# Altium PCB old_Sampler_DIOT.PCBDOC (part 4 of 8)
Units mm, origin at the board's own origin, x right, y up, seen from the top; angles counter-clockwise.
Board outline 221.17 x 100 mm, 4 copper layers (Top, GP1(GND), L3, Bot), stack 1.648 mm thick; 664 components, 413 nets, 2128 pads, 926 vias.
Unrouted connection lines stored in the file: 1.
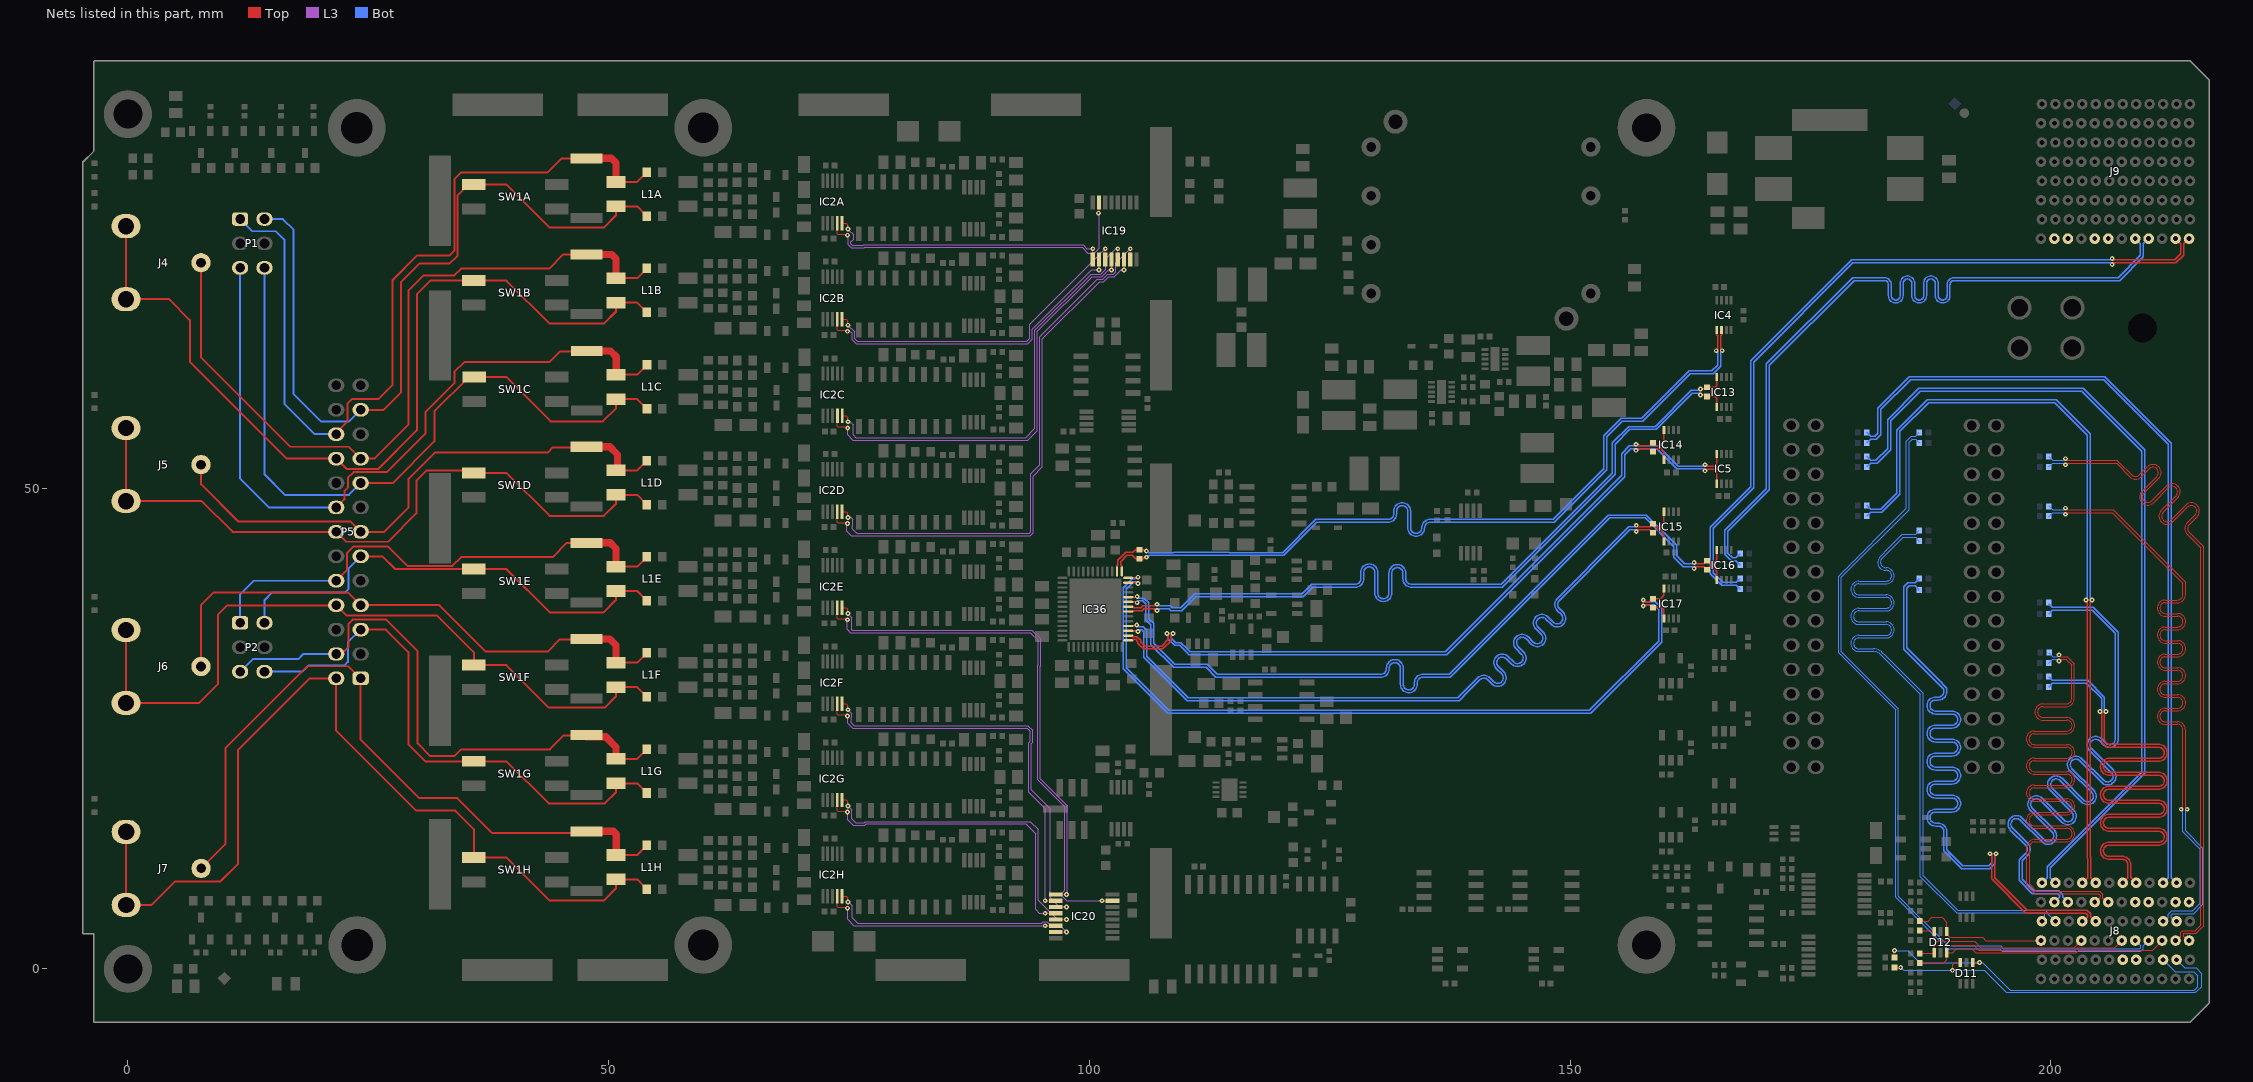
[diagram p5: the nets of this part, all layers, seen from the top]

## Via types
v1: diameter 0.5, hole 0.2, Top to Bot, tented both sides, 694 vias
v2: diameter 0.5, hole 0.2, Top to Bot, 186 vias
v3: diameter 0.6, hole 0.3, Top to Bot, tented both sides, 24 vias
v4: diameter 1, hole 0.6, Top to Bot, tented both sides, 12 vias
v5: diameter 0.6, hole 0.3, Top to Bot, 6 vias
v6: diameter 0.406, hole 0.203, Top to Bot, 2 vias
v7: diameter 1.27, hole 0.711, Top to Bot, 2 vias

## Nets (pads, with @x,y where several pads share a name; then routed paths per layer and width w, separated by ;. In a path a pad name is that pad's centre, name@x,y a point inside that pad or via, vN(x,y) a via of type N, cw(c..) or ccw(c..) an arc to the next point about the centre after c; other vN are vias at no path point)
ADC_CLKOUT_N: IC13.8 IC36.34 R20.2 | length 82.6
  Top w0.152: IC36.34@104.039,37.665 104.465,37.665 104.563,37.568 105.366,37.568 105.546,37.748 106.756,37.748 106.93,37.921 v1(107.019,37.921) ; v1(163.569,60.318) 164.054,60.318 R20.2@164.21,60.474 165.069,60.474 165.229,60.634 IC13.8@165.229,61.529
  Bot w0.152: v1(107.019,37.921) 107.108,37.921 107.282,37.748 108.413,37.748 108.593,37.568 109.484,37.568 110.938,39.023 122.123,39.023 123.105,40.005 127.429,40.005 127.658,40.005 ccw(c127.658,40.581) 128.234,40.581 128.234,41.232 cw(c129.115,41.232) 129.115,42.113 cw(c129.115,41.232) 129.996,41.232 129.996,39.082 ccw(c130.572,39.082) 130.572,38.506 ccw(c130.572,39.082) 131.148,39.082 131.148,41.174 cw(c132.029,41.174) 132.029,42.055 cw(c132.029,41.174) 132.91,41.174 132.91,40.581 ccw(c133.486,40.581) 133.486,40.005 140.2,40.005 142.83,40.005 154.375,51.55 154.375,54.703 156.077,56.405 158.83,56.405 162.582,60.157 163.408,60.157 v1(163.569,60.318)
ADC_CLKOUT_P: IC13.1 IC36.33 R20.1 | length 82.7
  Top w0.152: IC36.33@104.039,37.165 104.465,37.165 104.563,37.263 105.492,37.263 105.672,37.443 106.756,37.443 106.93,37.269 v1(107.019,37.269) ; v1(163.569,59.691) 164.054,59.691 R20.1@164.21,59.534 165.054,59.534 165.25,59.338 IC13.1@165.25,58.45
  Bot w0.152: v1(107.019,37.269) 107.108,37.269 107.282,37.443 108.287,37.443 108.466,37.263 109.61,37.263 111.065,38.718 122.249,38.718 123.231,39.7 127.429,39.7 127.658,39.7 ccw(c127.658,40.581) 128.539,40.581 128.539,41.232 cw(c129.115,41.232) 129.115,41.809 cw(c129.115,41.232) 129.691,41.232 129.691,39.082 ccw(c130.572,39.082) 130.572,38.201 ccw(c130.572,39.082) 131.453,39.082 131.453,41.174 cw(c132.029,41.174) 132.029,41.751 cw(c132.029,41.174) 132.605,41.174 132.605,40.581 ccw(c133.486,40.581) 133.486,39.7 140.2,39.7 142.956,39.7 154.68,51.424 154.68,54.577 156.203,56.1 158.956,56.1 162.708,59.852 163.408,59.852 v1(163.569,59.691)
ADC_IN_N0: L1A.2 P1.2 P5.23 R8A.1 SW1A.1 | length 82.8
  Top w0.203: P5.23@24.2,58.15 26.6,58.15 28.419,59.969 28.419,71.463 30.316,73.36 33.44,73.36 34.276,74.196 34.276,80.453 35.413,81.59 39.366,81.59 43.826,77.13 49.517,77.13 50.76,78.373 L1A.2@50.76,79.304 52.948,79.304 R8A.1@53.964,78.288
  Bot w0.203: P1.2@14.2,77.99 16.102,77.99 17.225,76.867 17.225,59.775 20.05,56.95 23,56.95 P5.23@24.2,58.15
ADC_IN_N1: J4.2 L1B.2 P5.20 R8B.1 SW1B.1 | length 91.8
  Top w0.203: J4.2@-0.2,77.25 J4.2@-0.2,69.65 4.274,69.65 6.45,67.474 6.45,63.125 16.505,53.07 P5.20@21.66,53.07 22.739,51.991 24.647,51.991 26.016,51.991 30.044,56.019 30.044,70.18 31.444,71.58 35.403,71.58 35.413,71.59 39.366,71.59 43.851,67.105 49.492,67.105 50.76,68.373 L1B.2@50.76,69.304 52.948,69.304 R8B.1@53.964,68.288
ADC_IN_N2: L1C.2 P1.6 P5.17 R8C.1 SW1C.1 | length 72.9
  Top w0.203: P5.17@24.2,50.53 27.545,50.53 31.869,54.854 31.869,57.989 35.426,61.546 39.379,61.546 43.97,56.955 49.398,56.955 50.773,58.329 L1C.2@50.773,59.26 52.961,59.26 R8C.1@53.977,58.244
  Bot w0.203: P1.6@14.2,72.91 14.2,51.425 16.325,49.3 22.97,49.3 P5.17@24.2,50.53
ADC_IN_N3: J5.2 L1D.2 P5.14 R8D.1 SW1D.1 | length 72.4
  Top w0.203: J5.2@-0.2,56.25 J5.2@-0.2,48.65 7.675,48.65 10.875,45.45 P5.14@21.66,45.45 22.685,44.425 27.05,44.425 30,47.375 30,50.784 31.046,51.83 35.173,51.83 35.413,51.59 39.366,51.59 43.851,47.105 49.492,47.105 50.76,48.373 L1D.2@50.76,49.304 52.948,49.304 R8D.1@53.964,48.288
ADC_IN_N4: L1E.2 P2.2 P5.11 R8E.1 SW1E.1 | length 49.6
  Top w0.203: P5.11@24.2,42.91 26.465,42.91 27.785,41.59 SW1E.1@35.986,41.59 39.366,41.59 43.876,37.08 49.467,37.08 50.76,38.373 L1E.2@50.76,39.304 52.948,39.304 R8E.1@53.964,38.288
  Bot w0.203: P2.2@14.2,35.99 14.2,38.35 14.975,39.125 22.55,39.125 22.925,39.5 22.925,41.635 P5.11@24.2,42.91
ADC_IN_N5: J6.2 L1F.2 P5.8 R8F.1 SW1F.1 | length 77.2
  Top w0.203: J6.2@-0.2,35.25 J6.2@-0.2,27.65 7.375,27.65 9.35,29.625 9.35,36.845 10.305,37.8 21.63,37.8 P5.8@21.66,37.83 22.714,36.776 32.123,36.776 35.986,32.913 SW1F.1@35.986,31.59 39.366,31.59 43.776,27.18 49.567,27.18 50.76,28.373 L1F.2@50.76,29.304 52.948,29.304 R8F.1@53.964,28.288
ADC_IN_N6: L1G.2 P2.6 P5.5 R8G.1 SW1G.1 | length 58.2
  Top w0.203: P5.5@23.7,35.29 25.63,35.29 26.835,35.29 29.17,32.955 29.17,23.355 30.935,21.59 SW1G.1@35.986,21.59 39.366,21.59 43.751,17.205 49.592,17.205 50.76,18.373 L1G.2@50.76,19.304 52.948,19.304 R8G.1@53.964,18.288
  Bot w0.203: P2.6@14.2,30.91 18.135,30.91 18.775,31.55 22.5,31.55 22.875,31.925 22.875,33.965 P5.5@24.2,35.29
ADC_IN_N7: J7.2 L1H.2 P5.2 R8H.1 SW1H.1 | length 94.8
  Top w0.203: J7.2@-0.195,14.25 J7.2@-0.195,6.65 2.45,6.65 4.9,9.1 9.625,9.1 11.425,10.9 11.425,22.725 18.91,30.21 P5.2@21.66,30.21 21.66,24.79 30,16.45 34.05,16.45 35.986,14.514 SW1H.1@35.986,11.59 39.366,11.59 43.826,7.13 49.517,7.13 50.76,8.373 L1H.2@50.76,9.304 52.948,9.304 R8H.1@53.964,8.288
ADC_IN_P0: L1A.1 P1.1 P5.22 R1A.1 R5A.2 | length 88
  Top w0.203: P5.22@21.66,55.61 21.66,55.76 22.825,56.925 22.825,58.771 23.349,59.295 26.07,59.295 27.53,60.755 27.53,71.65 30.06,74.18 33.414,74.18 33.946,74.712 33.946,82.133 34.649,82.836 43.65,82.836 45.077,84.263 47.652,84.263 R5A.2@47.694,84.305 ; L1A.1@50.76,81.844 52.961,81.844 53.847,82.73 53.847,82.743 R1A.1@53.964,82.86
  Top w0.762: R5A.2@47.694,84.305 50.294,84.305 50.76,83.839 L1A.1@50.76,81.844
  Bot w0.203: P1.1@11.66,77.99 12.93,76.72 15.394,76.72 16.275,75.839 16.275,58.775 19.44,55.61 P5.22@21.66,55.61
ADC_IN_P1: J4.1 L1B.1 P5.19 R1B.1 R5B.2 | length 80.2
  Top w0.203: J4.1@7.6,73.45 7.6,63.581 16.876,54.305 22.965,54.305 P5.19@24.2,53.07 25.63,53.07 29.2,56.64 29.2,70.575 30.758,72.133 33.946,72.133 34.649,72.836 43.825,72.836 45.294,74.305 47.544,74.305 47.619,74.23 R5B.2@47.694,74.305 ; L1B.1@50.76,71.844 52.961,71.844 53.847,72.73 53.847,72.743 R1B.1@53.964,72.86
  Top w0.762: R5B.2@47.694,74.305 50.319,74.305 50.76,73.864 L1B.1@50.76,71.844
ADC_IN_P2: L1C.1 P1.5 P5.16 R1C.1 R5C.2 | length 77.8
  Top w0.203: P5.16@21.66,47.99 22.505,48.835 22.505,49.683 22.863,50.041 22.863,51.063 23.461,51.661 26.894,51.661 30.95,55.717 30.95,57.922 33.958,60.93 33.958,62.089 34.974,63.105 43.819,63.105 44.944,64.23 47.654,64.23 47.665,64.219 R5C.2@47.707,64.261 ; L1C.1@50.773,61.8 52.973,61.8 53.86,62.686 53.86,62.699 R1C.1@53.977,62.816
  Top w0.762: R5C.2@47.707,64.261 50.188,64.261 50.769,63.68 50.769,61.804 L1C.1@50.773,61.8
  Bot w0.203: P1.5@11.66,72.91 11.66,50.99 14.66,47.99 P5.16@21.66,47.99
ADC_IN_P3: J5.1 L1D.1 P5.13 R1D.1 R5D.2 | length 58.5
  Top w0.203: J5.1@7.6,52.45 7.6,50.395 11.445,46.55 23.1,46.55 P5.13@24.2,45.45 26.653,45.45 29.2,47.997 29.2,50.986 31.944,53.73 43.694,53.73 44.194,54.23 47.619,54.23 R5D.2@47.694,54.305 ; L1D.1@50.76,51.844 52.961,51.844 53.847,52.73 53.847,52.743 R1D.1@53.964,52.86
  Top w0.762: R5D.2@47.694,54.305 50.119,54.305 50.919,53.505 50.919,52.003 L1D.1@50.76,51.844
ADC_IN_P4: L1E.1 P2.1 P5.10 R1E.1 R5E.2 | length 52.8
  Top w0.203: P5.10@21.66,40.37 22.775,41.485 22.775,43.236 23.489,43.95 27.025,43.95 29.055,41.92 33.733,41.92 34.649,42.836 44.175,42.836 45.644,44.305 47.61,44.305 47.652,44.263 R5E.2@47.694,44.305 ; L1E.1@50.76,41.844 52.961,41.844 53.847,42.73 53.847,42.743 R1E.1@53.964,42.86
  Top w0.762: R5E.2@47.694,44.305 50.169,44.305 50.76,43.714 L1E.1@50.76,41.844
  Bot w0.203: P2.1@11.66,35.99 11.66,38.96 13.07,40.37 P5.10@21.66,40.37
ADC_IN_P5: J6.1 L1F.1 P5.7 R1F.1 R5F.2 | length 58.9
  Top w0.203: J6.1@7.6,31.45 7.6,37.85 8.875,39.125 22.905,39.125 P5.7@24.2,37.83 25.63,37.83 32.395,37.83 37.217,33.008 43.647,33.008 44.902,34.263 47.652,34.263 R5F.2@47.694,34.305 ; L1F.1@50.76,31.844 52.961,31.844 53.847,32.73 53.847,32.743 R1F.1@53.964,32.86
  Top w0.762: R5F.2@47.694,34.305 50.119,34.305 50.76,33.664 L1F.1@50.76,31.844
ADC_IN_P6: L1G.1 P2.5 P5.4 R1G.1 R5G.2 | length 60.5
  Top w0.203: P5.4@21.66,32.75 22.2,32.75 22.95,33.5 22.95,35.9 23.375,36.325 26.85,36.325 30.13,33.045 30.13,23.445 31.442,22.133 33.946,22.133 34.649,22.836 43.875,22.836 45.319,24.28 47.669,24.28 R5G.2@47.694,24.305 ; L1G.1@50.894,21.844 52.961,21.844 53.847,22.73 53.847,22.743 R1G.1@53.964,22.86
  Top w0.762: R5G.2@47.669,24.142 49.679,24.142 50.76,23.061 50.76,21.978 50.894,21.844 L1G.1@50.76,21.844
  Bot w0.203: P2.5@11.66,30.91 12.978,32.228 17.728,32.228 18.25,32.75 P5.4@21.66,32.75
ADC_IN_P7: J7.1 L1H.1 P5.1 R1H.1 R5H.2 | length 74.5
  Top w0.203: J7.1@7.605,10.45 10.125,12.97 10.125,22.95 18.65,31.475 22.935,31.475 P5.1@24.2,30.21 24.2,23.85 30.3,17.75 34.266,17.75 37.861,14.155 R5H.2@47.694,14.155 ; L1H.1@50.76,11.844 52.961,11.844 53.847,12.73 53.847,12.743 R1H.1@53.964,12.86
  Top w0.762: R5H.2@47.694,14.305 50.469,14.305 50.769,14.005 50.769,11.853 L1H.1@50.76,11.844
ADC_SCK_N: IC4.5 IC36.42 R79.1 | length 82.6
  Top w0.152: IC36.42@102.864,41.34 102.864,41.942 102.962,42.039 102.962,42.492 103.778,43.308 104.516,43.308 104.808,43.6 R79.1@105.194,43.6 105.58,43.6 105.711,43.469 v1(105.917,43.469) ; v2(165.186,64.3) 165.347,64.461 165.347,65.851 165.25,65.949 IC4.5@165.25,66.45
  Bot w0.152: v1(105.917,43.469) 106.011,43.469 106.174,43.306 108.759,43.306 108.78,43.327 114.522,43.327 114.544,43.306 120.086,43.306 123.53,46.75 130.838,46.75 131.066,46.75 ccw(c131.066,47.326) 131.643,47.326 131.643,47.613 cw(c132.524,47.613) 132.524,48.494 cw(c132.524,47.613) 133.405,47.613 133.405,45.869 ccw(c133.981,45.869) 133.981,45.293 ccw(c133.981,45.869) 134.557,45.869 cw(c135.438,45.869) 135.438,46.75 145.975,46.75 148.225,46.75 153.5,52.025 153.5,55.475 155.305,57.28 157.449,57.28 162.374,62.205 164.752,62.205 165.347,62.8 165.347,64.139 v2(165.186,64.3)
ADC_SCK_P: IC4.6 IC36.41 R79.2 | length 82.7
  Top w0.152: IC36.41@103.364,41.34 103.364,41.942 103.266,42.039 103.266,42.365 103.904,43.003 104.465,43.003 104.808,42.66 R79.2@105.194,42.66 105.58,42.66 105.737,42.817 v1(105.944,42.817) ; IC4.6@165.75,66.45 165.75,65.949 165.652,65.851 165.652,64.461 v2(165.813,64.3)
  Bot w0.152: v1(105.944,42.817) 106.023,42.817 106.207,43.001 108.885,43.001 108.906,43.022 114.396,43.022 114.417,43.001 120.212,43.001 123.656,46.445 130.838,46.445 131.066,46.445 ccw(c131.066,47.326) 131.947,47.326 131.947,47.613 cw(c132.524,47.613) 132.524,48.19 cw(c132.524,47.613) 133.1,47.613 133.1,45.869 ccw(c133.981,45.869) 133.981,44.988 ccw(c133.981,45.869) 134.862,45.869 cw(c135.438,45.869) 135.438,46.445 145.975,46.445 148.351,46.445 153.805,51.899 153.805,55.349 155.431,56.975 157.575,56.975 162.5,61.9 164.878,61.9 165.652,62.674 165.652,64.139 v2(165.813,64.3)
ADC_SDOA_N: IC5.1 IC14.1 IC36.28 R21.1 | length 81
  Top w0.152: IC36.28@104.039,34.665 104.465,34.665 104.563,34.568 104.919,34.568 105.326,34.161 105.326,34.018 105.764,33.58 107.52,33.58 108.219,34.279 108.219,34.68 108.058,34.841 v1(108.058,34.879) ; v2(156.86,53.937) 157.021,54.098 158.282,54.098 R21.1@158.6,53.78 158.929,54.109 159.44,54.109 159.75,53.8 IC14.1@159.75,52.95 ; v2(164.035,51.804) 164.035,51.825 164.175,51.965 165.089,51.965 165.255,51.799 165.255,50.455 IC5.1@165.25,50.45
  Bot w0.152: v1(108.058,34.879) 108.058,34.785 108.219,34.624 108.219,34.274 108.854,33.639 109.384,33.639 110.159,32.864 110.352,32.671 137.152,32.671 155.675,51.194 155.675,53.475 156.288,54.088 156.889,54.088 157.05,53.927 157.211,54.088 159.002,54.088 161.098,51.993 163.846,51.993 v2(164.035,51.804)
ADC_SDOA_P: IC5.8 IC14.8 IC36.27 R21.2 | length 81.2
  Top w0.152: IC36.27@104.039,34.165 104.465,34.165 104.563,34.263 104.793,34.263 105.021,34.035 105.021,33.892 105.258,33.655 105.638,33.275 107.646,33.275 108.524,34.153 108.524,34.68 108.685,34.841 v1(108.685,34.879) ; v2(156.86,54.564) 157.021,54.402 158.282,54.402 R21.2@158.6,54.72 158.906,54.414 159.434,54.414 159.75,54.73 IC14.8@159.75,56.05 ; v2(164.035,52.431) 164.035,52.41 164.175,52.27 165.089,52.27 165.255,52.436 165.255,53.545 IC5.8@165.25,53.55
  Bot w0.152: v1(108.685,34.879) 108.685,34.785 108.524,34.624 108.524,34.4 108.98,33.944 109.51,33.944 110.182,33.272 110.479,32.976 137.026,32.976 155.37,51.32 155.37,53.601 156.162,54.393 156.889,54.393 157.05,54.554 157.211,54.393 159.128,54.393 161.224,52.298 163.902,52.298 v2(164.035,52.431)
ADC_SDOB_N: IC15.8 IC36.30 R22.2 | length 82.2
  Top w0.152: IC36.30@104.039,35.665 104.968,35.665 104.924,35.709 v1(104.924,35.757) ; v2(156.875,46.133) 157.036,45.972 158.282,45.972 R22.2@158.6,46.29 158.918,45.972 159.322,45.972 159.75,46.4 IC15.8@159.75,47.55
  Bot w0.152: v1(104.924,35.757) 105.006,35.757 105.187,35.575 105.581,35.575 105.955,35.201 105.955,32.53 110.28,28.205 138.33,28.205 139.21,29.085 140.402,30.277 cw(c141.025,29.654) 141.648,30.277 142.062,29.863 ccw(c142.47,30.27) 142.877,30.678 142.318,31.237 cw(c142.94,31.86) 142.317,32.482 142.318,32.484 cw(c142.94,31.86) 143.563,32.483 144.123,31.924 ccw(c144.53,32.331) 144.938,32.738 144.378,33.298 cw(c145.001,33.921) 144.377,34.543 144.379,34.544 cw(c145.001,33.921) 145.624,34.544 146.184,33.984 ccw(c146.591,34.392) 146.999,33.984 ccw(c146.591,34.392) 146.999,34.799 146.439,35.359 cw(c147.062,35.982) 146.438,36.604 146.44,36.605 ; 146.44,36.605 cw(c147.062,35.982) 147.685,36.605 148.245,36.045 ccw(c148.652,36.453) 149.059,36.86 148.646,37.273 cw(c149.268,37.897) 148.645,38.52 155.005,44.88 156.099,45.974 ; 156.1,45.972 156.714,45.972 v2(156.875,46.133)
ADC_SDOB_P: IC15.1 IC36.29 R22.1 | length 81.9
  Top w0.152: IC36.29@104.039,35.165 104.968,35.165 v1(105.044,35.089) ; v2(156.875,45.506) 157.036,45.668 158.282,45.668 R22.1@158.6,45.35 158.918,45.668 159.333,45.668 159.75,45.25 IC15.1@159.75,44.45
  L3 w0.152: v1(105.044,35.089) v1@105.044,35.263
  Bot w0.152: v1(105.044,35.089) 105.126,35.089 105.307,35.271 105.454,35.271 105.65,35.075 105.65,32.404 110.154,27.9 138.456,27.9 139.426,28.869 140.618,30.062 cw(c141.025,29.654) 141.432,30.062 141.847,29.647 ccw(c142.47,30.27) 143.092,29.646 143.093,29.648 ccw(c142.47,30.27) 143.093,30.893 142.533,31.453 cw(c142.94,31.86) 143.348,32.268 143.907,31.708 ccw(c144.53,32.331) 145.153,31.707 145.154,31.709 ccw(c144.53,32.331) 145.153,32.954 144.594,33.514 cw(c145.001,33.921) 145.409,34.328 145.968,33.769 ccw(c146.591,34.392) 147.214,33.769 ccw(c146.591,34.392) 147.214,35.015 146.655,35.574 cw(c147.062,35.982) 147.469,36.389 148.029,35.83 ccw(c148.652,36.453) 149.274,35.829 149.275,35.83 ccw(c148.652,36.453) 149.275,37.076 148.861,37.49 cw(c149.268,37.897) 148.861,38.305 155.221,44.664 156.224,45.668 156.714,45.668 v2(156.875,45.506)
ADC_SDOC_N: IC16.8 IC36.36 R23.2 | length 82.4
  Top w0.152: IC36.36@104.039,38.665 104.893,38.665 v1(104.969,38.742) ; v2(162.9,42.279) 163.061,42.118 163.909,42.118 R23.2@164.226,42.435 164.544,42.118 164.8,42.118 165.25,42.568 IC16.8@165.25,43.55
  Bot w0.152: v1(104.969,38.742) 105.143,38.568 105.676,38.568 106.163,38.081 106.163,36.462 106.3,36.325 106.694,35.931 106.694,33.856 108.875,31.675 112.256,31.675 113.281,30.65 130.087,30.65 130.316,30.65 ccw(c130.316,31.226) 130.892,31.226 130.892,31.289 cw(c131.773,31.289) 131.773,32.17 cw(c131.773,31.289) 132.654,31.289 132.654,29.601 ccw(c133.23,29.601) 133.23,29.025 ccw(c133.23,29.601) 133.806,29.601 133.806,29.769 cw(c134.687,29.769) 134.687,30.65 136.418,30.65 137.425,30.65 153.98,47.205 157.926,47.205 161.076,44.055 161.076,42.949 161.907,42.118 162.739,42.118 v2(162.9,42.279)
ADC_SDOC_P: IC16.1 IC36.35 R23.1 | length 82.3
  Top w0.152: IC36.35@104.039,38.165 104.64,38.165 104.649,38.174 104.884,38.174 v1(104.969,38.089) ; v2(162.9,41.652) 163.061,41.813 163.909,41.813 R23.1@164.226,41.495 164.544,41.813 164.8,41.813 165.25,41.362 IC16.1@165.25,40.45
  Bot w0.152: v1(104.969,38.089) 105.143,38.263 105.55,38.263 105.859,37.954 105.859,36.335 106.389,35.805 106.389,33.73 108.749,31.37 112.13,31.37 113.155,30.345 130.087,30.345 130.316,30.345 ccw(c130.316,31.226) 131.197,31.226 131.197,31.289 cw(c131.773,31.289) 131.773,31.865 cw(c131.773,31.289) 132.349,31.289 132.349,29.601 ccw(c133.23,29.601) 133.23,28.72 ccw(c133.23,29.601) 134.111,29.601 134.111,29.769 cw(c134.687,29.769) 134.687,30.345 136.418,30.345 137.551,30.345 154.106,46.9 157.8,46.9 160.771,43.929 160.771,42.823 161.781,41.813 162.739,41.813 v2(162.9,41.652)
ADC_SDOD_N: IC17.8 IC36.40 R24.2 | length 83.4
  Top w0.152: IC36.40@104.039,40.665 104.988,40.665 v1(105.064,40.742) ; v2(157.6,38.355) 157.6,38.268 157.675,38.193 158.282,38.193 R24.2@158.6,38.511 ; R24.2@158.671,38.511 159.409,38.511 159.75,38.852 IC17.8@159.75,39.55
  Bot w0.152: v1(105.064,40.742) 104.975,40.742 104.801,40.568 104.459,40.568 103.512,39.621 103.512,31.202 108.131,26.583 144.342,26.583 148.476,26.583 ; v2(157.6,38.355) 157.761,38.193 158.863,38.193 159.505,37.551 159.505,33.955 152.133,26.583 150.467,26.583 ; 148.476,26.583 150.467,26.583 ; 148.476,26.583 150.467,26.583
ADC_SDOD_P: IC17.1 IC36.39 R24.1 | length 81.7
  Top w0.152: IC36.39@104.039,40.165 104.988,40.165 v1(105.064,40.089) ; v2(157.6,37.728) 157.6,37.814 157.675,37.889 158.282,37.889 R24.1@158.6,37.571 ; R24.1@158.671,37.571 159.579,37.571 159.75,37.4 IC17.1@159.75,36.45
  Bot w0.152: v1(105.064,40.089) 104.975,40.089 104.801,40.263 104.585,40.263 103.817,39.495 103.817,31.328 108.257,26.888 144.342,26.888 148.349,26.888 ; v2(157.6,37.728) 157.761,37.889 158.736,37.889 159.2,37.425 159.2,34.081 152.007,26.888 150.467,26.888 ; 148.349,26.888 150.467,26.888 ; 148.349,26.888 150.467,26.888
BGA0: D12.6 J8.C3 R90.2 | length 26.5
  Top w0.127: R90.2@186.37,0.6 188.85,0.6 189.175,0.925 D12.6@189.175,1.245 ; D12.6@189.175,1.675 189.201,1.701 189.776,1.701 190.175,2.1 191.776,2.1 192.174,1.701 202.639,1.701 202.893,1.955 210.575,1.955 J8.C3@211.569,2.95
BGA1: D12.4 J8.F3 R91.2 | length 22.4
  Top w0.127: R91.2@186.37,1.6 187.8,1.6 D12.4@187.875,1.675 187.875,2.341 187.984,2.45 191.99,2.45 192.484,1.955 202.534,1.955 202.788,2.209 206.629,2.209 J8.F3@207.369,2.95
BGA2: D12.3 J8.I3 R94.2 | length 18.3
  Top w0.127: R94.2@186.37,3.95 187.36,3.95 D12.3@187.875,3.95 ; D12.3@187.875,3.875 187.875,2.975 188,2.85 192.081,2.85 192.721,2.209 202.429,2.209 J8.I3@203.169,2.95
BGA3: D12.1 J8.L3 R99.2 | length 14.4
  Top w0.127: R99.2@186.44,4.95 187.225,4.95 187.625,5.35 188.679,5.35 189.175,4.854 189.175,3.6 189.5,3.275 192.927,3.275 193.252,2.95 J8.L3@198.969,2.95
BP_I2C.SCL: D11.3 J8.B2 R121.1 | length 39.3
  Top w0.127: R121.1@183.733,0.141 v2(184.381,0.141) ; v2(189.775,-0.15) 189.775,0.445 189.98,0.65 D11.3@190.575,0.65
  Bot w0.127: v2(184.381,0.141) 184.672,-0.15 v2(189.775,-0.15) 190.775,-0.15 193.05,-0.15 195.354,-2.454 215.015,-2.454 215.069,-2.4 215.141,-2.4 215.7,-1.841 215.7,-0.5 215.1,0.1 213.919,0.1 J8.B2@213.069,0.95
BP_I2C.SDA: D11.1 J8.C2 R120.1 | length 40.2
  Top w0.127: R120.1@183.733,1.182 v2(183.733,1.9) ; D11.1@191.875,0.65 v2(192.575,0.65)
  Bot w0.127: v2(183.733,1.9) 185.13,1.9 186.38,0.65 v2(192.575,0.65) 192.92,0.65 195.77,-2.2 214.91,-2.2 215.269,-1.841 215.269,-0.7 214.869,-0.3 212.919,-0.3 J8.C2@211.669,0.95
BP_IO.LVDS_N0: J8.E3 R138.1 | length 82.4
  Bot w0.127: R138.1@186.33,54.7 185.92,55.11 185.6,55.11 185.25,54.76 185.25,47.775 178.204,40.729 178.204,32.996 184.125,27.075 184.125,7.57 189.316,2.379 194.791,2.379 195.07,2.1 209.229,2.1 209.329,2.2 209.329,2.39 J8.E3@208.769,2.95
BP_IO.LVDS_N1: J8.B3 R139.1 | length 78.5
  Top w0.127: v2(201.513,52.437) 201.687,52.61 206.66,52.61 206.79,52.61 206.828,52.572 ; 206.828,52.572 208.215,51.185 ccw(c208.812,51.78) 209.408,51.184 210.228,52.004 cw(c210.627,51.606) 211.025,52.004 cw(c210.627,51.606) 211.026,51.208 209.486,49.669 ccw(c210.082,49.073) 209.486,48.477 ccw(c210.082,49.073) 210.678,48.477 ; 210.679,48.477 212.217,50.015 cw(c212.616,49.617) 213.015,49.219 211.475,47.68 ccw(c212.071,47.084) 211.475,46.488 ccw(c212.071,47.084) 212.667,46.488 ; 212.668,46.488 214.206,48.026 cw(c214.605,47.628) 215.003,48.026 cw(c214.605,47.628) 215.004,47.23 214.183,46.409 ccw(c214.779,45.813) 214.184,45.216 215.218,44.182 215.321,44.079 215.6,43.8 215.6,4.561 215.018,3.979 213.693,3.979 213.529,3.816 213.529,3.339 213.14,2.95 J8.B3@212.969,2.95
  Bot w0.127: R139.1@199.77,52.2 200.18,52.61 201.34,52.61 v2(201.513,52.437)
BP_IO.LVDS_N2: J8.C4 R140.1 | length 77.1
  Top w0.127: v2(201.513,47.286) 201.687,47.46 206.365,47.46 213.725,40.1 213.725,39.965 213.725,38.93 cw(c213.162,38.93) 213.162,38.366 211.896,38.366 ccw(c211.896,37.523) 211.053,37.523 ccw(c211.896,37.523) 211.896,36.68 213.174,36.68 cw(c213.174,36.117) 213.738,36.117 cw(c213.174,36.117) 213.174,35.553 211.896,35.553 ccw(c211.896,34.711) 211.053,34.711 ccw(c211.896,34.711) 211.896,33.868 213.174,33.868 cw(c213.174,33.304) 213.738,33.304 cw(c213.174,33.304) 213.174,32.741 211.896,32.741 ccw(c211.896,31.898) 211.053,31.898 ccw(c211.896,31.898) 211.896,31.055 213.174,31.055 cw(c213.174,30.491) 213.738,30.491 cw(c213.174,30.491) 213.174,29.928 211.896,29.928 ccw(c211.896,29.085) 211.053,29.085 ccw(c211.896,29.085) 211.896,28.242 213.174,28.242 cw(c213.174,27.679) 213.738,27.679 cw(c213.174,27.679) 213.174,27.115 211.896,27.115 ccw(c211.896,26.272) 211.053,26.272 ccw(c211.896,26.272) 211.896,25.429 213.162,25.429 cw(c213.162,24.866) 213.725,24.866 213.725,24.663 213.725,16.774 v2(213.551,16.6)
  Bot w0.127: R140.1@199.77,47.05 200.18,47.46 201.34,47.46 v2(201.513,47.286) ; J8.C4@211.669,4.95 211.84,4.95 212.229,5.339 212.229,5.694 212.564,6.029 214.75,6.029 215.541,6.82 215.541,12.439 213.725,14.255 213.725,16.426 v2(213.551,16.6)
BP_IO.LVDS_N3: J8.L4 R141.1 | length 77.3
  Bot w0.127: 179.186,33.854 ccw(c180.029,33.854) 180.029,33.011 181.524,33.011 cw(c181.524,31.951) 182.274,32.701 182.379,32.596 186.421,28.554 186.421,9.584 190.184,5.821 199.314,5.821 199.382,5.752 199.382,5.263 J8.L4@199.069,4.95 ; 179.186,33.854 cw(c180.029,33.854) 180.029,34.697 182.869,34.697 ccw(c182.869,35.261) 183.433,35.261 ccw(c182.869,35.261) 182.869,35.824 180.029,35.824 cw(c180.029,36.667) 179.186,36.667 cw(c180.029,36.667) 180.029,37.51 182.869,37.51 ccw(c182.869,38.074) 183.433,38.074 ccw(c182.869,38.074) 182.869,38.637 180.029,38.637 cw(c180.029,39.48) 179.186,39.48 cw(c180.029,39.48) 180.029,40.323 182.869,40.323 ccw(c182.869,40.886) 183.433,40.886 ccw(c182.869,40.886) 182.869,41.45 182.835,41.45 cw(c182.835,42.293) 182.239,42.889 183.146,43.796 184.54,45.19 185.92,45.19 R141.1@186.33,45.6
BP_IO.LVDS_N4: J8.I4 R142.1 | length 74.9
  Top w0.152: v2(193.675,11.975) 193.824,11.826 193.824,11.777 193.834,11.766 193.834,9.36 197.395,5.8 203.617,5.8 203.817,5.6 203.817,5.399 203.368,4.95 J8.I4@203.269,4.95
  Bot w0.152: R142.1@186.33,39.4 185.882,39.848 185.248,39.848 185,39.6 185,33.375 188.21,30.165 189.175,29.2 189.175,28.844 cw(c188.295,28.844) 188.295,27.964 188.006,27.964 ccw(c188.006,27.388) 188.006,26.812 189.74,26.812 cw(c189.74,25.931) 189.74,25.051 188.006,25.051 ccw(c188.006,24.475) 188.006,23.899 189.74,23.899 cw(c189.74,23.019) 189.74,22.138 188.006,22.138 ccw(c188.006,21.562) 188.006,20.986 189.74,20.986 cw(c189.74,20.106) 189.74,19.225 188.006,19.225 ccw(c188.006,18.649) 188.006,18.073 189.74,18.073 cw(c189.74,17.193) 189.74,16.313 188.006,16.313 ccw(c188.006,15.737) 188.006,15.161 188.295,15.161 cw(c188.295,14.28) 189.175,14.28 189.175,12.858 189.175,12.405 190.855,10.725 193.519,10.725 193.834,11.041 193.834,11.816 v2(193.675,11.975)
BP_IO.LVDS_N5: J8.K5 R143.1 | length 79.7
  Bot w0.152: R143.1@199.755,36.9 200.152,37.298 204.296,37.298 206.7,34.894 206.7,25.794 206.7,23.903 cw(c206.124,23.903) 205.716,23.495 205.287,23.924 ccw(c204.665,23.301) 204.042,23.925 204.041,23.924 ccw(c204.665,23.301) 204.042,22.678 206.302,20.418 cw(c205.894,20.011) 206.302,19.603 cw(c205.894,20.011) 205.487,19.603 203.227,21.864 ccw(c202.604,21.241) 201.981,21.864 ccw(c202.604,21.241) 201.981,20.618 204.241,18.357 cw(c203.834,17.95) 204.241,17.543 cw(c203.834,17.95) 203.426,17.543 201.166,19.803 ccw(c200.543,19.18) 199.92,19.803 ccw(c200.543,19.18) 199.92,18.557 202.18,16.297 cw(c201.773,15.889) 202.18,15.482 cw(c201.773,15.889) 201.365,15.482 199.105,17.742 ccw(c198.482,17.119) 197.859,17.742 ccw(c198.482,17.119) 197.859,16.496 200.119,14.236 cw(c199.712,13.828) 200.119,13.421 cw(c199.712,13.828) 199.305,13.421 197.044,15.681 ccw(c196.421,15.058) 195.799,15.682 195.798,15.68 ccw(c196.421,15.058) 195.798,14.435 197.384,12.849 cw(c196.977,12.442) 197.384,12.034 197.223,11.873 196.7,11.35 196.7,9.2 198.085,7.815 200.702,7.815 200.917,7.6 200.917,7.498 J8.K5@200.369,6.95
BP_IO.LVDS_N6: J8.H5 R144.1 | length 78.9
  Top w0.127: v2(200.858,32.037) 201.032,32.21 201.585,32.21 201.676,32.119 202.158,31.638 202.158,28.116 cw(c201.594,28.116) 201.594,27.553 199.167,27.553 ccw(c199.167,26.71) 198.325,26.71 ccw(c199.167,26.71) 199.167,25.867 201.645,25.867 cw(c201.645,25.303) 202.208,25.303 cw(c201.645,25.303) 201.645,24.74 198.283,24.74 ccw(c198.283,23.897) 197.44,23.897 ccw(c198.283,23.897) 198.283,23.054 201.645,23.054 cw(c201.645,22.49) 202.208,22.49 cw(c201.645,22.49) 201.645,21.927 198.283,21.927 ccw(c198.283,21.084) 197.44,21.084 ccw(c198.283,21.084) 198.283,20.241 201.645,20.241 cw(c201.645,19.678) 202.208,19.678 cw(c201.645,19.678) 201.645,19.114 198.283,19.114 ccw(c198.283,18.271) 197.44,18.271 ccw(c198.283,18.271) 198.283,17.428 201.645,17.428 cw(c201.645,16.865) 202.208,16.865 cw(c201.645,16.865) 201.645,16.301 198.283,16.301 ccw(c198.283,15.458) 197.44,15.458 ccw(c198.283,15.458) 198.283,14.616 201.645,14.616 cw(c201.645,14.052) 202.208,14.052 cw(c201.645,14.052) 201.645,13.489 198.343,13.489 ccw(c198.343,12.646) 197.5,12.646 197.5,11.036 197.5,8.671 198.356,7.815 199.03,7.815 204.958,7.815 205.129,7.644 205.129,7.369 204.71,6.95 J8.H5@204.569,6.95
  Bot w0.127: R144.1@199.77,31.8 200.18,32.21 200.684,32.21 v2(200.858,32.037)
BP_IO.LVDS_N7: J8.F6 R145.1 | length 75.9
  Top w0.152: v2(205.109,26.775) 205.27,26.614 205.27,26.432 205.27,23.934 ccw(c206.151,23.934) 206.151,23.053 211.202,23.053 cw(c211.202,22.476) 211.778,22.476 cw(c211.202,22.476) 211.202,21.9 206.041,21.9 ccw(c206.041,21.019) 205.16,21.019 ccw(c206.041,21.019) 206.041,20.138 211.202,20.138 cw(c211.202,19.562) 211.778,19.562 cw(c211.202,19.562) 211.202,18.986 206.041,18.986 ccw(c206.041,18.105) 205.16,18.105 ccw(c206.041,18.105) 206.041,17.224 211.202,17.224 cw(c211.202,16.648) 211.778,16.648 cw(c211.202,16.648) 211.202,16.071 206.041,16.071 ccw(c206.041,15.19) 205.16,15.19 ccw(c206.041,15.19) 206.041,14.309 211.202,14.309 cw(c211.202,13.733) 211.778,13.733 cw(c211.202,13.733) 211.202,13.157 206.041,13.157 ccw(c206.041,12.276) 205.16,12.276 ccw(c206.041,12.276) 206.041,11.395 207.424,11.395 cw(c207.424,10.819) 208,10.819 208,10.59 208,9.481 J8.F6@207.469,8.95
  Bot w0.152: R145.1@199.77,29.3 200.168,29.698 203.704,29.698 205.27,28.132 205.27,26.936 v2(205.109,26.775)
BP_IO.LVDS_N8: J8.C6 R146.1 | length 84.2
  Bot w0.152: R146.1@180.87,54.7 181.268,55.098 181.829,55.098 182.305,55.574 182.305,58.205 185.4,61.3 205.475,61.3 212.217,54.558 212.217,51.878 212.217,27.2 212.217,9.498 J8.C6@211.669,8.95
BP_IO.LVDS_N9: J8.L6 R147.1 | length 85.4
  Bot w0.152: R147.1@180.87,52.2 181.268,52.598 181.929,52.598 183.325,53.994 183.325,57 186.395,60.07 203.224,60.07 209.445,53.849 209.445,20.476 199.617,10.648 199.617,9.498 J8.L6@199.069,8.95
BP_IO.LVDS_N10: J8.I6 R148.1 | length 80
  Top w0.152: J8.I6@203.269,8.95 203.817,9.498 203.817,11.5 203.8,11.517 203.8,38.214 v2(203.639,38.375)
  Bot w0.152: R148.1@180.87,47.1 181.268,47.498 182.429,47.498 184.275,49.344 184.275,55.9 187.275,58.9 200.425,58.9 203.8,55.525 203.8,50.252 203.8,41.25 203.8,38.536 v2(203.639,38.375)
BP_IO.LVDS_N11: J9.E1 R149.1 | length 80.7
  Bot w0.152: R149.1@167.674,42 167.226,42.448 166.774,42.448 166.095,43.126 166.095,45.626 170.42,49.951 170.42,62.92 179.4,71.9 181.2,71.9 182.648,71.9 cw(c182.648,71.138) 183.41,71.138 183.41,70.023 ccw(c183.867,70.023) 184.324,70.023 184.324,71.306 cw(c185.086,71.306) 185.848,71.306 185.848,70.023 ccw(c186.305,70.023) 186.763,70.023 186.763,71.306 cw(c187.525,71.306) 188.287,71.306 188.287,70.023 ccw(c188.744,70.023) 189.201,70.023 189.201,71.138 cw(c189.963,71.138) 189.963,71.9 190.997,71.9 207.017,71.9 209.317,74.2 209.317,75.402 J9.E1@208.769,75.95
BP_IO.LVDS_N12: J9.B1 R150.1 | length 78.9
  Top w0.152: v2(206.375,73.891) 206.536,73.73 212.871,73.73 213.517,74.375 213.517,75.402 J9.B1@212.969,75.95
  Bot w0.152: R150.1@167.674,39.5 167.597,39.576 167.597,39.6 167.3,39.898 165.763,39.898 164.57,41.09 164.57,45.941 168.8,50.171 168.8,63.238 179.292,73.73 180.95,73.73 197.494,73.73 206.225,73.73 206.375,73.88 v2(206.375,73.891)
BP_IO.LVDS_N13: J9.K1
BP_IO.LVDS_N14: J9.H1
BP_IO.LVDS_N15: J8.F2
BP_IO.LVDS_P0: J8.D3 R122.1 | length 83.8
  Bot w0.127: R122.1@186.33,55.8 185.92,55.39 185.484,55.39 184.971,54.876 184.971,47.891 177.925,40.845 177.925,32.88 183.846,26.959 183.846,7.454 189.2,2.1 194.675,2.1 194.954,1.821 209.345,1.821 209.609,2.084 209.609,2.39 J8.D3@210.169,2.95
BP_IO.LVDS_P1: J8.A3 R123.1 | length 78.9
  Top w0.127: v2(201.513,53.064) 201.687,52.89 206.905,52.89 206.923,52.873 207.025,52.77 208.413,51.382 ccw(c208.812,51.78) 209.21,51.382 210.031,52.202 cw(c210.627,51.606) 211.223,52.202 cw(c210.627,51.606) 211.223,51.01 ; 211.222,51.009 209.684,49.471 ccw(c210.082,49.073) 209.684,48.674 ccw(c210.082,49.073) 210.48,48.674 212.02,50.213 cw(c212.616,49.617) 213.168,50.254 213.171,50.254 213.253,50.172 213.253,50.169 cw(c212.616,49.617) 213.212,49.021 ; 213.211,49.02 211.673,47.482 ccw(c212.071,47.084) 211.673,46.685 ccw(c212.071,47.084) 212.469,46.685 214.009,48.224 cw(c214.605,47.628) 215.201,48.224 cw(c214.605,47.628) 215.201,47.032 ; J8.A3@214.369,2.95 214.198,2.95 213.809,3.339 213.809,3.7 215.134,3.7 215.798,4.364 215.879,4.445 215.879,43.916 215.798,43.998 215.518,44.277 215.416,44.379 214.38,45.415 cw(c214.779,45.813) 214.38,46.212 215.2,47.031
  Bot w0.127: R123.1@199.77,53.3 200.18,52.89 200.9,52.89 201.34,52.89 v2(201.513,53.064)
BP_IO.LVDS_P2: J8.B4 R124.1 | length 77.6
  Top w0.127: v2(201.513,47.913) 201.687,47.74 206.48,47.74 214.004,40.216 214.004,39.965 214.004,38.93 cw(c213.162,38.93) 213.162,38.087 211.896,38.087 ccw(c211.896,37.523) 211.332,37.523 ccw(c211.896,37.523) 211.896,36.96 213.174,36.96 cw(c213.174,36.117) 214.017,36.117 cw(c213.174,36.117) 213.174,35.274 211.896,35.274 ccw(c211.896,34.711) 211.332,34.711 ccw(c211.896,34.711) 211.896,34.147 213.174,34.147 cw(c213.174,33.304) 214.017,33.304 cw(c213.174,33.304) 213.174,32.461 211.896,32.461 ccw(c211.896,31.898) 211.332,31.898 ccw(c211.896,31.898) 211.896,31.334 213.174,31.334 cw(c213.174,30.491) 214.017,30.491 cw(c213.174,30.491) 213.174,29.648 211.896,29.648 ccw(c211.896,29.085) 211.332,29.085 ccw(c211.896,29.085) 211.896,28.521 213.174,28.521 cw(c213.174,27.679) 214.017,27.679 cw(c213.174,27.679) 213.174,26.836 211.896,26.836 ccw(c211.896,26.272) 211.332,26.272 ccw(c211.896,26.272) 211.896,25.709 213.162,25.709 cw(c213.162,24.866) 214.004,24.866 214.004,24.663 214.004,16.774 v2(214.178,16.6)
  Bot w0.127: R124.1@199.77,48.15 200.18,47.74 201.34,47.74 v2(201.513,47.913) ; J8.B4@213.069,4.95 212.898,4.95 212.509,5.339 212.509,5.579 212.68,5.75 214.866,5.75 215.821,6.705 215.821,12.554 214.004,14.371 214.004,16.426 v2(214.178,16.6)
BP_IO.LVDS_P3: J8.K4 R125.1 | length 77.1
  Bot w0.127: 179.466,33.854 ccw(c180.029,33.854) 180.029,33.291 181.524,33.291 cw(c181.524,31.951) 182.472,32.898 ; 179.466,33.854 cw(c180.029,33.854) 180.029,34.418 182.869,34.418 ccw(c182.869,35.261) 183.712,35.261 ccw(c182.869,35.261) 182.869,36.104 180.029,36.104 cw(c180.029,36.667) 179.466,36.667 cw(c180.029,36.667) 180.029,37.231 182.869,37.231 ccw(c182.869,38.074) 183.712,38.074 ccw(c182.869,38.074) 182.869,38.916 180.029,38.916 cw(c180.029,39.48) 179.466,39.48 cw(c180.029,39.48) 180.029,40.043 182.869,40.043 ccw(c182.869,40.886) 183.712,40.886 ccw(c182.869,40.886) 182.869,41.729 182.835,41.729 cw(c182.835,42.293) 182.436,42.691 183.541,43.796 184.655,44.91 185.92,44.91 R125.1@186.33,44.5 ; 182.472,32.898 182.774,32.596 186.7,28.67 186.7,9.7 190.3,6.1 199.43,6.1 199.58,5.95 199.661,5.868 199.661,5.758 J8.K4@200.469,4.95
BP_IO.LVDS_P4: J8.H4 R126.1 | length 76.6
  Top w0.152: v2(194.302,11.975) 194.153,11.975 194.153,11.777 194.139,11.762 194.139,9.486 197.521,6.104 203.743,6.104 204.121,5.726 204.121,5.399 204.57,4.95 J8.H4@204.669,4.95
  Bot w0.152: R126.1@186.33,40.6 185.882,40.152 185.122,40.152 184.696,39.726 184.696,33.249 187.78,30.165 188.871,29.074 188.871,28.844 cw(c188.295,28.844) 188.295,28.268 188.006,28.268 ccw(c188.006,27.388) 188.006,26.507 189.74,26.507 cw(c189.74,25.931) 189.74,25.355 188.006,25.355 ccw(c188.006,24.475) 188.006,23.595 189.74,23.595 cw(c189.74,23.019) 189.74,22.443 188.006,22.443 ccw(c188.006,21.562) 188.006,20.682 189.74,20.682 cw(c189.74,20.106) 189.74,19.53 188.006,19.53 ccw(c188.006,18.649) 188.006,17.769 189.74,17.769 cw(c189.74,17.193) 189.74,16.617 188.006,16.617 ccw(c188.006,15.737) 188.006,14.856 188.295,14.856 cw(c188.295,14.28) 188.871,14.28 188.871,12.858 188.871,12.279 190.729,10.421 193.645,10.421 194.139,10.915 194.139,11.812 v2(194.302,11.975)
BP_IO.LVDS_P5: J8.J5 R127.1 | length 80.2
  Bot w0.152: R127.1@199.755,38 200.152,37.602 204.423,37.602 207.005,35.02 207.005,25.489 207.005,23.903 cw(c206.124,23.903) 205.5,23.281 205.072,23.709 ccw(c204.665,23.301) 204.257,22.894 206.517,20.634 cw(c205.894,20.011) 206.517,19.388 cw(c205.894,20.011) 205.271,19.388 203.011,21.648 ccw(c202.604,21.241) 202.196,21.648 ccw(c202.604,21.241) 202.196,20.833 204.457,18.573 cw(c203.834,17.95) 204.457,17.327 cw(c203.834,17.95) 203.211,17.327 200.95,19.587 ccw(c200.543,19.18) 200.136,19.587 ccw(c200.543,19.18) 200.136,18.772 202.396,16.512 cw(c201.773,15.889) 202.396,15.266 cw(c201.773,15.889) 201.15,15.266 198.89,17.526 ccw(c198.482,17.119) 198.075,17.526 ccw(c198.482,17.119) 198.075,16.712 200.335,14.451 cw(c199.712,13.828) 200.335,13.205 cw(c199.712,13.828) 199.089,13.205 196.829,15.466 ccw(c196.421,15.058) 196.014,14.651 197.6,13.065 cw(c196.977,12.442) 197.6,11.819 197.438,11.657 197.005,11.224 197.005,9.326 198.211,8.12 200.828,8.12 201.221,7.726 201.221,7.498 J8.J5@201.769,6.95
BP_IO.LVDS_P6: J8.G5 R128.1 | length 79.4
  Top w0.127: v2(200.858,32.664) 201.032,32.49 201.701,32.49 202.071,32.119 202.437,31.753 202.437,28.116 cw(c201.594,28.116) 201.594,27.273 199.167,27.273 ccw(c199.167,26.71) 198.604,26.71 ccw(c199.167,26.71) 199.167,26.146 201.645,26.146 cw(c201.645,25.303) 202.487,25.303 cw(c201.645,25.303) 201.645,24.46 198.283,24.46 ccw(c198.283,23.897) 197.719,23.897 ccw(c198.283,23.897) 198.283,23.333 201.645,23.333 cw(c201.645,22.49) 202.487,22.49 cw(c201.645,22.49) 201.645,21.648 198.283,21.648 ccw(c198.283,21.084) 197.719,21.084 ccw(c198.283,21.084) 198.283,20.521 201.645,20.521 cw(c201.645,19.678) 202.487,19.678 cw(c201.645,19.678) 201.645,18.835 198.283,18.835 ccw(c198.283,18.271) 197.719,18.271 ccw(c198.283,18.271) 198.283,17.708 201.645,17.708 cw(c201.645,16.865) 202.487,16.865 cw(c201.645,16.865) 201.645,16.022 198.283,16.022 ccw(c198.283,15.458) 197.719,15.458 ccw(c198.283,15.458) 198.283,14.895 201.645,14.895 cw(c201.645,14.052) 202.487,14.052 cw(c201.645,14.052) 201.645,13.209 198.343,13.209 ccw(c198.343,12.646) 197.779,12.646 197.779,11.036 197.779,8.786 198.471,8.094 205.074,8.094 205.155,8.013 205.409,7.759 205.409,7.369 205.828,6.95 J8.G5@205.969,6.95
  Bot w0.127: R128.1@199.77,32.9 200.18,32.49 200.684,32.49 v2(200.858,32.664)
BP_IO.LVDS_P7: J8.E6 R129.1 | length 76.4
  Top w0.152: v2(205.736,26.775) 205.575,26.614 205.575,26.432 205.575,23.934 ccw(c206.151,23.934) 206.151,23.357 211.202,23.357 cw(c211.202,22.476) 212.083,22.476 cw(c211.202,22.476) 211.202,21.595 206.041,21.595 ccw(c206.041,21.019) 205.465,21.019 ccw(c206.041,21.019) 206.041,20.443 211.202,20.443 cw(c211.202,19.562) 212.083,19.562 cw(c211.202,19.562) 211.202,18.681 206.041,18.681 ccw(c206.041,18.105) 205.465,18.105 ccw(c206.041,18.105) 206.041,17.529 211.202,17.529 cw(c211.202,16.648) 212.083,16.648 cw(c211.202,16.648) 211.202,15.767 206.041,15.767 ccw(c206.041,15.19) 205.465,15.19 ccw(c206.041,15.19) 206.041,14.614 211.202,14.614 cw(c211.202,13.733) 212.083,13.733 cw(c211.202,13.733) 211.202,12.852 206.041,12.852 ccw(c206.041,12.276) 205.465,12.276 ccw(c206.041,12.276) 206.041,11.7 207.424,11.7 cw(c207.424,10.819) 208.305,10.819 208.305,10.59 208.305,9.514 J8.E6@208.869,8.95
  Bot w0.152: R129.1@199.77,30.4 200.168,30.002 203.83,30.002 205.575,28.258 205.575,26.936 v2(205.736,26.775)
BP_IO.LVDS_P8: J8.B6 R130.1 | length 84.8
  Bot w0.152: R130.1@180.87,55.8 181.268,55.402 181.702,55.402 182,55.7 182,58.331 185.274,61.605 205.601,61.605 212.521,54.685 212.521,51.878 212.521,27.2 212.521,9.498 J8.B6@213.069,8.95
BP_IO.LVDS_P9: J8.K6 R131.1 | length 85.9
  Bot w0.152: R131.1@180.87,53.3 181.268,52.902 181.802,52.902 183.02,54.12 183.02,57.126 186.269,60.375 203.35,60.375 209.75,53.975 209.75,20.35 199.921,10.521 199.921,9.498 J8.K6@200.469,8.95
BP_IO.LVDS_P10: J8.H6 R132.1 | length 80.5
  Top w0.152: v2(204.266,38.375) 204.105,38.214 204.105,11.643 204.121,11.626 204.121,9.498 J8.H6@204.669,8.95
  Bot w0.152: R132.1@180.87,48.2 181.268,47.802 182.302,47.802 183.97,49.47 183.97,56.026 187.149,59.205 200.551,59.205 204.105,55.651 204.105,50.252 204.105,41.25 204.105,38.536 v2(204.266,38.375)
BP_IO.LVDS_P11: J9.D1 R133.1 | length 80.2
  Bot w0.152: R133.1@167.674,43.2 167.226,42.752 166.9,42.752 166.4,43.252 166.4,45.5 170.725,49.825 170.725,62.794 179.526,71.595 181.2,71.595 182.648,71.595 cw(c182.648,71.138) 183.105,71.138 183.105,70.023 ccw(c183.867,70.023) 184.629,70.023 184.629,71.306 cw(c185.086,71.306) 185.543,71.306 185.543,70.023 ccw(c186.305,70.023) 187.067,70.023 187.067,71.306 cw(c187.525,71.306) 187.982,71.306 187.982,70.023 ccw(c188.744,70.023) 189.506,70.023 189.506,71.138 cw(c189.963,71.138) 189.963,71.595 190.997,71.595 207.143,71.595 209.621,74.074 209.621,75.402 J9.D1@210.169,75.95
BP_IO.LVDS_P12: J9.A1 R134.1 | length 78.4
  Top w0.152: v2(206.375,73.264) 206.536,73.425 212.998,73.425 213.821,74.249 213.821,75.402 J9.A1@214.369,75.95
  Bot w0.152: R134.1@167.674,40.6 167.597,40.524 167.597,40.5 167.3,40.202 165.889,40.202 164.875,41.217 164.875,45.815 169.105,50.045 169.105,63.112 179.418,73.425 180.95,73.425 197.494,73.425 206.225,73.425 206.375,73.275 v2(206.375,73.264)
BP_IO.LVDS_P13: J9.J1
BP_IO.LVDS_P14: J9.G1
BP_IO.LVDS_P15: J8.E2
BP_MGT_Rx_N: J8.E5
BP_MGT_Rx_P: J8.D5
BP_MGT_Tx_N: J8.B5
BP_MGT_Tx_P: J8.A5
CH0_A0: IC2A.4 IC19.15 | length 35.2
  Top w0.127: IC2A.4@73.775,77.567 73.775,76.458 73.825,76.408 74.754,76.408 v1(74.85,76.312) ; IC19.15@100.927,79.62 IC19.15@101.004,79.697 101.004,78.657 v1(100.944,78.597)
  L3 w0.127: v1(74.85,76.312) 74.934,76.397 74.934,75.73 74.919,75.715 74.919,75.302 75.211,75.01 76.573,75.01 76.608,75.045 99.229,75.045 99.844,74.43 100.377,74.43 100.405,74.459 100.536,74.459 101.004,74.926 101.004,78.657 v1(100.944,78.597)
CH0_A1: IC2A.5 IC19.1 | length 29.5
  Top w0.127: IC2A.5@74.275,77.567 74.688,77.567 74.875,77.379 v1(74.875,76.947) ; IC19.1@100.354,73.797 v1(100.354,74.899)
  L3 w0.127: v1(74.875,76.947) 75.469,76.354 75.469,75.905 75.173,75.609 75.173,75.407 75.316,75.264 76.468,75.264 76.503,75.299 99.334,75.299 99.734,74.899 v1(100.354,74.899)
CH1_A0: IC2B.4 IC19.2 | length 34.3
  Top w0.127: IC2B.4@73.775,67.567 73.775,66.458 73.825,66.408 74.754,66.408 v1(74.85,66.312) ; v1(101.004,72.695) IC19.2@101.004,73.797
  L3 w0.127: v1(74.85,66.312) 74.934,66.397 75.043,66.397 75.315,66.125 75.315,65.425 75.739,65.001 93.599,65.001 94.073,65.475 94.073,66.518 100.25,72.695 v1(101.004,72.695)
CH1_A1: IC2B.5 IC19.3 | length 35
  Top w0.127: IC2B.5@74.275,67.567 74.688,67.567 74.875,67.379 v1(74.875,66.947) ; IC19.3@101.654,73.797 v1(101.654,74.899)
  L3 w0.127: v1(74.875,66.947) 75.569,66.254 75.569,65.53 75.844,65.255 93.494,65.255 93.819,65.58 93.819,67.065 v1(101.654,74.899)
CH2_A0: IC2C.4 IC19.4 | length 45.3
  Top w0.127: IC2C.4@73.788,57.523 73.788,56.414 73.838,56.364 74.767,56.364 v1(74.863,56.269) ; v1(102.304,72.695) IC19.4@102.304,73.797
  L3 w0.127: v1@74.947,56.353 v1(74.863,56.269) 74.863,55.536 75.398,55.001 93.59,55.001 94.581,55.992 94.581,66.308 100.274,72.001 101.291,72.001 102.006,72.716 102.283,72.716 102.304,72.737 v1(102.304,72.695)
CH2_A1: IC2C.5 IC19.5 | length 46.3
  Top w0.127: IC2C.5@74.288,57.523 74.7,57.523 74.888,57.335 v1(74.888,56.904) ; IC19.5@102.954,73.797 v1(102.954,74.899)
  L3 w0.127: v1(74.888,56.904) 75.095,56.904 75.419,56.58 75.419,55.53 75.694,55.255 93.369,55.255 94.327,56.213 94.327,66.413 100.169,72.255 101.186,72.255 101.694,72.763 101.694,73.88 102.713,74.899 v1(102.954,74.899)
CH3_A0: IC2D.4 IC19.6 | length 56
  Top w0.127: IC2D.4@73.775,47.567 73.775,46.458 73.825,46.408 74.754,46.408 v1(74.85,46.312) ; v1(103.604,72.695) IC19.6@103.604,73.797
  L3 w0.127: v1@74.934,46.397 v1(74.85,46.312) 74.769,46.231 74.769,45.53 75.248,45.051 93.823,45.051 94.152,45.38 94.152,51.263 95.089,52.2 95.089,65.525 101.057,71.493 101.502,71.493 102.01,72.001 102.591,72.001 103.286,72.695 v1(103.604,72.695)
CH3_A1: IC2D.5 IC19.7 | length 57
  Top w0.127: IC2D.5@74.275,47.567 74.688,47.567 74.875,47.379 v1(74.875,46.947) ; IC19.7@104.254,73.797 v1(104.254,74.899)
  L3 w0.127: v1(74.875,46.947) 75.177,46.947 75.369,46.755 75.369,46.03 75.344,46.005 75.344,45.755 75.794,45.305 93.718,45.305 93.898,45.485 93.898,51.513 94.835,52.45 94.835,65.746 100.836,71.747 101.396,71.747 101.904,72.255 102.486,72.255 102.744,72.513 102.744,73.39 v1(104.254,74.899)
CH4_A0: IC2E.4 IC20.15 | length 57.1
  Top w0.127: IC2E.4@73.775,37.567 73.775,36.458 73.825,36.408 74.754,36.408 v1(74.85,36.312) ; v1(101.297,7.087) IC20.15@102.399,7.087
  L3 w0.127: v1@74.934,36.397 v1(74.85,36.312) 74.794,36.256 74.794,35.305 75.119,34.98 93.844,34.98 94.669,34.155 94.669,31.637 94.65,31.618 94.65,19.674 97.444,16.88 97.444,9.348 97.436,9.34 97.436,8.195 97.16,7.919 97.16,7.554 97.628,7.087 v1(101.297,7.087)
CH4_A1: IC2E.5 IC20.1 | length 51.9
  Top w0.127: IC2E.5@74.275,37.567 74.688,37.567 74.875,37.379 v1(74.875,36.947) ; IC20.1@96.499,7.737 v1(97.601,7.737)
  L3 w0.127: v1(74.875,36.947) 75.291,36.532 75.291,35.249 75.305,35.234 94.015,35.234 94.923,34.326 94.923,31.532 94.904,31.512 94.904,19.78 97.698,16.985 97.698,9.243 97.69,9.235 97.69,7.826 v1(97.601,7.737)
CH5_A0: IC2F.4 IC20.2 | length 42
  Top w0.127: IC2F.4@73.775,27.567 73.775,26.458 73.825,26.408 74.754,26.408 v1(74.85,26.312) ; v1(95.397,7.087) IC20.2@96.499,7.087
  L3 w0.127: v1@74.934,26.397 v1(74.85,26.312) 74.85,25.524 75.369,25.005 93.519,25.005 93.835,24.69 93.835,23.673 93.694,23.532 93.694,18.38 95.397,16.677 v1(95.397,7.087)
CH5_A1: IC2F.5 IC20.3 | length 43.3
  Top w0.127: IC2F.5@74.275,27.567 74.688,27.567 74.875,27.379 v1(74.875,26.947) ; IC20.3@96.499,6.437 v1(97.601,6.437)
  L3 w0.127: v1(74.875,26.947) 75.291,26.532 75.291,26.13 75.244,26.083 75.244,25.605 75.544,25.305 93.578,25.305 94.089,24.795 94.089,23.567 93.948,23.427 93.948,18.626 95.944,16.63 95.944,7.38 96.887,6.437 v1(97.601,6.437)
CH6_A0: IC2G.4 IC20.4 | length 33.6
  Top w0.127: IC2G.4@73.775,17.567 73.775,16.458 73.825,16.408 74.754,16.408 v1(74.85,16.312) ; v1(95.397,5.787) IC20.4@96.499,5.787
  L3 w0.127: v1@74.934,16.397 v1(74.85,16.312) 74.85,15.499 75.419,14.93 76.649,14.93 76.79,15.071 93.403,15.071 94.394,14.08 94.394,6.183 94.791,5.787 v1(95.397,5.787)
CH6_A1: IC2G.5 IC20.5 | length 34.8
  Top w0.127: IC2G.5@74.275,17.567 74.688,17.567 74.875,17.379 v1(74.875,16.947) ; IC20.5@96.499,5.137 v1(97.601,5.137)
  L3 w0.127: v1(74.875,16.947) 75.291,16.532 75.291,15.634 75.719,15.205 76.565,15.205 76.685,15.325 93.849,15.325 94.66,14.514 94.66,7.146 96.67,5.137 v1(97.601,5.137)
CH7_A0: IC2H.4 IC20.6 | length 25.4
  Top w0.127: IC2H.4@73.775,7.567 73.775,6.458 73.825,6.408 74.754,6.408 v1(74.85,6.312) ; v1(95.397,4.487) IC20.6@96.499,4.487
  L3 w0.127: v1@74.934,6.397 v1(74.85,6.312) 74.85,5.149 75.512,4.487 v1(95.397,4.487)
CH7_A1: IC2H.5 IC20.7 | length 27.1
  Top w0.127: IC2H.5@74.275,7.567 74.688,7.567 74.875,7.379 v1(74.875,6.947) ; IC20.7@96.499,3.837 v1(97.601,3.837)
  L3 w0.127: v1(74.875,6.947) 74.952,6.947 75.319,6.58 75.319,5.33 75.894,4.755 95.042,4.755 95.214,4.927 95.579,4.927 96.126,4.38 97.057,4.38 v1(97.601,3.837)